# Altium PCB Hall_measurement_ver2.PcbDoc (part 2 of 2)
Units mm, origin at the board's own origin, x right, y up, seen from the top; angles counter-clockwise.
Board outline 60 x 140 mm, 4 copper layers (Top Layer, GND, Supply, Bottom Layer), stack 0.778 mm thick; 193 components, 95 nets, 656 pads, 140 vias.
Unrouted connection lines stored in the file: 276.
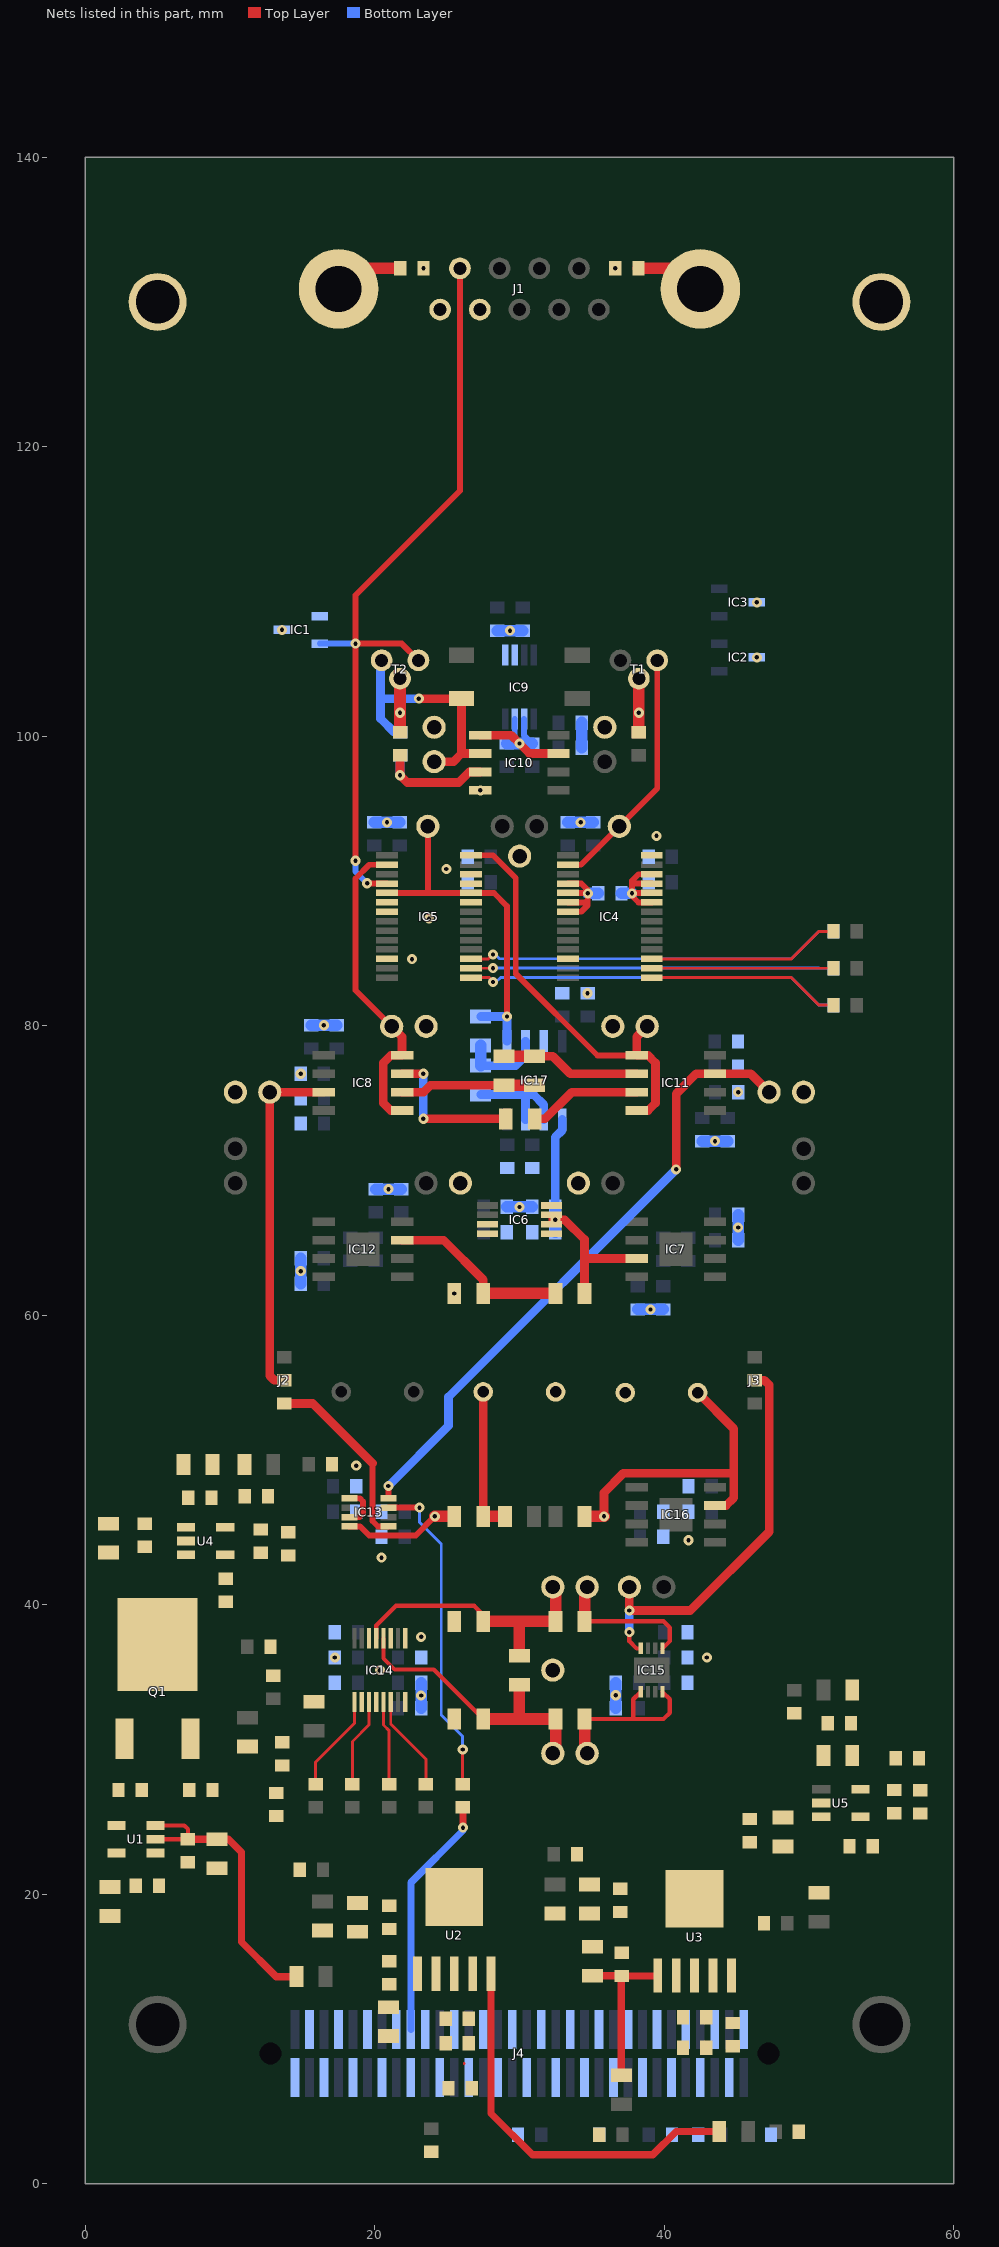
[diagram p4: the nets of this part, all layers, seen from the top]

## Via types
v1: diameter 0.7, hole 0.3, Top Layer to Bottom Layer, tented both sides, 73 vias
v2: diameter 0.7, hole 0.3, Top Layer to Bottom Layer, 67 vias

## Nets (pads, with @x,y where several pads share a name; then routed paths per layer and width w, separated by ;. In a path a pad name is that pad's centre, name@x,y a point inside that pad or via, vN(x,y) a via of type N, cw(c..) or ccw(c..) an arc to the next point about the centre after c; other vN are vias at no path point) (continued)
NetC52_1: C52.1 IC10.6 pad.@24.105,98.244 R26.2 T2.3 | length 18.6
  Top Layer w0.6: v1(23.05,102.595) R26.2@26,102.595 26,98.8 ; pad.@24.105,98.244 25.444,98.244 26,98.8 ; IC10.6@27.3,98.8 26,98.8
  Bottom Layer w0.6: T2.3@20.4,105.245 20.4,102.57 ; C52.1@21.75,100.275 21.345,100.275 20.4,101.22 20.4,102.57 ; v1(23.05,102.595) 20.425,102.595 20.4,102.57
NetC52_2: C52.2 IC10.7 R19.1 | length 8.8
  Top Layer w0.6: R19.1@21.75,98.645 v2(21.75,97.3) 22.25,96.8 25.8,96.8 26.53,97.53 IC10.7@27.3,97.53
  Bottom Layer w0.6: v2(21.75,97.3) C52.2@21.75,98.675
NetC53_1: C53.1 C54.2 IC14.4 pad.@32.305,29.734 R20.2 | length 19.8
  Top Layer w0.3: IC14.4@20.611,37.68 20.611,36.291 21.377,35.525 24.08,35.525 C53.1@27.5,32.105
  Top Layer w0.8: C53.1@27.5,32.105 30,32.105 ; C54.2@30,34.48 30,32.105 ; pad.@32.32,29.735 32.5,29.915 R20.2@32.5,32.105 30,32.105
NetC54_1: C54.1 C57.2 IC14.5 pad.@32.305,41.225 R29.2 | length 19.4
  Top Layer w0.3: IC14.5@20.111,37.68 20.111,38.566 21.475,39.93 21.525,39.93 26.87,39.93 27.5,39.3 C57.2@27.5,38.855
  Top Layer w0.8: C57.2@27.5,38.855 R29.2@32.5,38.855 32.5,41.045 pad.@32.32,41.225 ; C54.1@30,36.48 30,38.855
NetC55_2: C55.2 R21.2 R22.1 | length 10.1
  Top Layer w0.6: R21.2@27.5,46.106 C55.2@27.5,54.705
  Top Layer w0.8: R21.2@27.5,46.105 R22.1@29,46.105
NetC56_2: C56.2 IC16.3 R23.2 | length 22.3
  Top Layer w0.6: v2(35.845,46.105) 35.845,47.745 37.175,49.075 44.8,49.075 ; C56.2@42.31,54.655 44.8,52.165 44.8,49.075 ; IC16.3@43.51,46.853 44.273,46.853 44.8,47.38 44.8,49.075
  Top Layer w0.8: R23.2@34.5,46.105 v2(35.845,46.105)
NetC76_2: C76.2 C77.2 L1.2 Q1.3 U1.2 U1.3 | length 20.4
  Top Layer w0.3: U1.2@4.8,23.8 U1.2@4.85,23.8 6.3,23.8 C77.2@7.1,23.8 7.1,24.5 6.85,24.75 U1.3@4.85,24.75
  Top Layer w0.5: C77.2@7.1,23.8 C76.2@9.1,23.8 9.9,23.8 10.8,22.9 10.8,16.7 13.2,14.3 L1.2@14.6,14.3
NetC78_2: C78.2 C79.2 Q1.1 U1.5
NetC80_1: C80.1 R34.2
NetC80_2: C80.2 L2.1 Q1.2 R33.2
NetC83_2: C83.2 C84.2 L3.2 U2.1 U2.5 | length 27.3
  Top Layer w0.5: U2.5@28.04,14.504 28.04,4.86 30.9,2 39.212,2 40.812,3.6 L3.2@43.8,3.6
NetC85_1: C85.1 R36.1 R37.2 U2.4
NetC85_2: C85.2 C86.2 C87.2 L4.1 R36.2 U2.2
NetC90_2: C90.2 C91.2 L5.2 U3.1 U3.5 | length 11.5
  Top Layer w0.5: C90.2@35.05,14.375 C91.2@37.05,14.375 ; L5.2@37.041,7.49 37.041,14.366 C91.2@37.05,14.375 ; C91.2@37.091,14.334 C91.2@37.075,14.35 ; U3.1@39.56,14.39 39.52,14.35 C91.2@37.075,14.35 ; C91.2@37.05,14.375 C91.2@37.075,14.35 ; C91.2@37.05,14.375 C91.2@37.075,14.35
NetC92_1: C92.1 R38.1 R39.2 U3.4
NetC92_2: C92.2 C93.2 C94.2 L6.1 R38.2 U3.2
NetC97_2: C97.2 C98.2 L7.2 U4.2 U4.3
NetC99_2: C99.2 C100.2 C102.2 L8.1 R40.2 U4.5
NetC102_1: C102.1 R41.2
NetC104_2: C104.2 C105.2 L9.2 U5.2 U5.3
NetC106_2: C106.2 C107.2 C109.2 L10.1 R43.2 U5.5
NetC109_1: C109.1 R44.2
NetIC4_2: IC4.2 pad.@36.9,93.775 T1.1 | length 17.2
  Top Layer w0.4: IC4.2@33.35,91.12 34.245,91.12 39.52,96.395 T1.1@39.52,105.245
NetIC4_4: IC4.4 IC4.5 IC4.6 IC4.7 R4.1 | length 7.8
  Top Layer w0.4: IC4.7@33.35,87.87 34.275,87.87 34.725,88.32 34.725,88.67 ; IC4.6@33.35,88.52 34.575,88.52 34.725,88.67 ; IC4.5@33.35,89.17 34.575,89.17 v1@34.725,89.02 ; IC4.4@33.35,89.82 34.275,89.82 34.725,89.37 v1(34.725,89.145) v1@34.725,89.02 ; 34.725,88.67 v1@34.725,89.02
  Bottom Layer w0.8: v1(34.725,89.145) R4.1@35.45,89.145
NetIC4_15: IC4.15 R12.2 | length 13.3
  Top Layer w0.2: IC4.15@39.15,83.32 48.79,83.32 50.68,81.43 R12.2@51.7,81.43
NetIC4_16: IC4.16 R13.2 | length 12.6
  Top Layer w0.2: IC4.16@39.15,83.97 R13.2@51.7,83.97
NetIC4_17: IC4.17 R14.2 | length 13.3
  Top Layer w0.2: IC4.17@39.15,84.62 48.79,84.62 50.68,86.51 R14.2@51.7,86.51
NetIC4_23: IC4.23 IC4.24 IC4.25 IC4.26 R4.2 | length 7.8
  Top Layer w0.4: IC4.23@39.15,88.52 38.225,88.52 37.775,88.97 v1(37.775,89.145) v1@37.775,89.32 ; IC4.24@39.15,89.17 37.925,89.17 37.862,89.232 v1@37.775,89.32 ; IC4.25@39.15,89.82 37.925,89.82 37.775,89.67 ; IC4.26@39.15,90.47 38.225,90.47 37.775,90.02 37.775,89.67 ; v1@37.775,89.32 37.775,89.67
  Bottom Layer w0.8: R4.2@37.05,89.145 v1(37.775,89.145)
NetIC5_2: IC5.2 IC8.1 IC8.4 pad.@21.174,79.95 | length 21.9
  Top Layer w0.4: IC5.2@20.85,91.12 19.619,91.12 18.675,90.176 18.675,82.449 pad.@21.174,79.95
  Top Layer w0.6: pad.@21.174,79.95 21.89,79.234 IC8.4@21.89,77.95 21.125,77.95 20.6,77.425 20.6,74.655 21.115,74.14 IC8.1@21.89,74.14
NetIC5_15: IC5.15 R17.2 | length 26.1
  Top Layer w0.2: IC5.15@26.65,83.32 27.911,83.32 28.175,83.056 v1(28.175,83.025)
  Bottom Layer w0.2: v1(28.175,83.025) 28.39,83.025 28.685,83.32 48.79,83.32 50.68,81.43 R17.2@51.7,81.43
NetIC5_16: IC5.16 R16.2 | length 25.1
  Top Layer w0.2: IC5.16@26.65,83.97 28.175,83.97 v1(28.175,83.975)
  Bottom Layer w0.2: v1(28.175,83.975) 50.675,83.975 50.68,83.97 R16.2@51.7,83.97
NetIC5_17: IC5.17 R15.2 | length 26.1
  Top Layer w0.2: IC5.17@26.65,84.62 27.87,84.62 v1(28.175,84.925)
  Bottom Layer w0.2: v1(28.175,84.925) 28.331,84.925 28.631,84.625 48.795,84.625 50.68,86.51 R15.2@51.7,86.51
NetIC5_28: IC5.28 IC11.1 IC11.4 pad.@38.826,79.95 | length 29.1
  Top Layer w0.4: IC5.28@26.65,91.77 28.176,91.77 29.745,90.201 29.745,83.594 35.389,77.95 IC11.1@38.11,77.95
  Top Layer w0.6: IC11.4@38.11,74.14 38.885,74.14 39.4,74.655 39.4,77.43 38.88,77.95 IC11.1@38.11,77.95 38.11,79.234 pad.@38.826,79.95
NetIC8_2: IC8.2 R5.2 R6.2 | length 9.4
  Top Layer w0.6: IC8.2@21.89,75.41 23.368,75.41 23.853,75.895 R5.2@28.95,75.895
  Top Layer w0.8: R5.2@28.95,75.895 R6.2@31.05,75.895
NetIC8_3: IC8.3 R7.2 | length 10.4
  Top Layer w0.6: IC8.3@21.89,76.68 v1(23.365,76.68) ; v1(23.365,73.57) R7.2@29.05,73.57 R7.2@28.95,73.67
  Bottom Layer w0.6: v1(23.365,73.57) v1(23.365,76.68)
NetIC11_2: IC11.2 R5.1 R6.1 | length 9.7
  Top Layer w0.6: R6.1@31.05,77.895 32.305,77.895 33.52,76.68 IC11.2@38.11,76.68
  Top Layer w0.8: R5.1@28.95,77.895 R6.1@31.05,77.895
NetIC11_3: IC11.3 R7.1 | length 7.8
  Top Layer w0.6: R7.1@31.05,73.57 31.77,73.57 33.61,75.41 IC11.3@38.11,75.41
NetIC12_3: IC12.3 R9.1 R18.2 | length 12.7
  Top Layer w0.6: IC12.3@21.889,65.19 24.76,65.19 27.5,62.45 R18.2@27.5,61.505
  Top Layer w0.8: R18.2@27.5,61.505 R9.1@32.5,61.505
NetIC13_1: IC13.1 J2.3 | length 13.1
  Top Layer w0.4: 19.849,49.776 19.849,45.78 20.224,45.405 IC13.1@20.949,45.405
  Top Layer w0.6: J2.3@13.75,53.905 15.72,53.905 19.849,49.776
NetIC13_3: IC13.3 R28.2 | length 22.5
  Top Layer w0.2: R28.2@26.08,27.6 v1(26.08,30)
  Top Layer w0.4: IC13.3@20.974,46.68 IC13.3@20.949,46.705 20.951,46.707 v1(23.1,46.707)
  Bottom Layer w0.2: v1(23.1,46.707) 23.1,45.7 24.6,44.2 24.6,32.375 26.08,30.895 v1(26.08,30)
NetIC13_8: IC13.8 R21.1 | length 8.1
  Top Layer w0.4: IC13.8@18.249,45.405 18.995,45.405 19.62,44.78 22.83,44.78 v2(24.155,46.105)
  Top Layer w0.8: v2(24.155,46.105) R21.1@25.5,46.105
NetIC14_9: IC14.9 R30.1 | length 7.2
  Top Layer w0.2: R30.1@15.92,27.6 15.92,29.12 18.611,31.811 IC14.9@18.611,33.28 IC14.9@18.611,33.725
NetIC14_11: IC14.11 R27.1 | length 6.6
  Top Layer w0.2: R27.1@18.46,27.6 18.46,30.56 19.611,31.711 IC14.11@19.611,33.28 IC14.11@19.611,33.725
NetIC14_13: IC14.13 R25.1 | length 6.3
  Top Layer w0.2: IC14.13@20.611,33.725 IC14.13@20.611,33.28 20.611,31.689 21,31.3 R25.1@21,27.6
NetIC14_14: IC14.14 R24.1 | length 6.7
  Top Layer w0.2: IC14.14@21.111,33.28 21.111,31.755 23.54,29.326 R24.1@23.54,27.6
NetIC15_1: IC15.1 IC15.4 pad.@34.68,29.734 R20.1 | length 12.5
  Top Layer w0.3: R20.1@34.5,32.105 34.502,32.104 37.868,32.104 ; 38.148,32.104 37.868,32.104 ; IC15.1@38.382,33.98 37.87,33.468 37.87,33.167 37.869,33.166 37.869,32.544 37.87,32.543 37.87,32.105 ; IC15.4@39.882,33.98 40.395,33.467 40.395,32.544 39.956,32.105 37.87,32.105 ; 37.868,32.104 37.87,32.105
  Top Layer w0.8: R20.1@34.5,32.105 34.5,29.915 pad.@34.68,29.734
NetIC15_5: IC15.5 pad.@34.68,41.225 R29.1 | length 10.2
  Top Layer w0.3: R29.1@34.5,38.855 39.956,38.855 40.395,38.416 40.395,37.493 IC15.5@39.882,36.98
  Top Layer w0.8: R29.1@34.5,38.855 34.5,41.045 pad.@34.68,41.225
NetIC15_8: IC15.8 J3.2 pad.@37.597,41.225 | length 27.9
  Top Layer w0.3: v1(37.594,38.105) 37.594,37.481 38.095,36.98 IC15.8@38.382,36.98
  Top Layer w0.6: pad.@37.597,41.225 v1(37.597,39.607) 41.807,39.607 47.25,45.05 47.25,55.175 46.92,55.505 J3.2@46.3,55.505
  Bottom Layer w0.3: v1(37.594,38.105) v1@37.597,38.108
  Bottom Layer w0.6: v1@37.597,38.108 v1(37.597,39.607)
NetIC17_2: IC17.2 R31.2 R32.1 | length 5.8
  Bottom Layer w0.6: R31.2@27.325,77.245 29.75,77.245 30.415,77.91 IC17.2@30.415,78.92
  Bottom Layer w0.8: R31.2@27.325,77.245 R32.1@27.325,78.64
NetIC17_6: IC17.6 IC17.7 R31.1 | length 7.4
  Bottom Layer w0.6: R31.1@27.325,75.245 30.415,75.245 ; IC17.7@30.415,73.52 30.415,75.245 ; IC17.6@31.685,73.52 31.685,74.535 30.975,75.245 30.415,75.245
NetJ1_10: J1.10 R1.2 | length 4.9
  Top Layer w0.8: R1.2@38.225,132.322 41.073,132.322 J1.10@42.495,130.9
NetJ1_11: J1.11 R2.2 | length 4.9
  Top Layer w0.8: J1.11@17.505,130.9 18.927,132.322 R2.2@21.775,132.322
NetR8_2: R8.2 T1.2 | length 3.5
  Top Layer w0.8: R8.2@38.25,100.275 T1.2@38.25,103.775
  other v2: 38.25,101.62
NetR19_2: R19.2 T2.2 | length 3.7
  Top Layer w0.8: R19.2@21.75,100.275 21.75,101.42 T2.2@21.75,103.975
  other v2: 21.75,101.62
NetR33_1: R33.1 R34.1 R35.2 U1.4
NetR40_1: R40.1 R41.1 R42.2 U4.4
NetR43_1: R43.1 R44.1 R45.2 U5.4
OUT+: IC8.7 J2.2 pad.@12.75,75.41 | length 24.5
  Top Layer w0.6: J2.2@13.75,55.505 13.07,55.505 12.75,55.825 pad.@12.75,75.41 IC8.7@16.491,75.41
OUT-: IC11.7 IC13.4 pad.@47.25,75.41 | length 43.7
  Top Layer w0.4: IC13.4@20.949,47.355 v1(20.949,48.205)
  Top Layer w0.6: v1(40.825,70.075) 40.825,75.3 42.205,76.68 IC11.7@43.51,76.68 45.98,76.68 pad.@47.25,75.41
  Bottom Layer w0.6: v1(20.949,48.205) 25.1,52.356 25.1,54.35 v1(40.825,70.075)
REF5_1: C32.2 C33.2 IC9.6 IC9.7 IC10.3 IC10.5 | length 11.5
  Top Layer w0.6: IC10.5@27.3,100.07 29.425,100.07 v1(30,99.495) 30.695,98.8 IC10.3@32.7,98.8
  Bottom Layer w0.4: C33.2@29.125,99.495 29.675,100.045 IC9.7@29.675,101.195 ; IC9.6@30.325,101.195 30.325,100.045 C32.2@30.875,99.495
  Bottom Layer w0.8: C33.2@29.125,99.495 v1(30,99.495) C32.2@30.875,99.495
REF5_2: C22.2 C23.2 IC6.6 IC6.7 IC7.3 IC17.5 R9.2 | length 18.6
  Top Layer w0.4: IC6.6@32.2,66.28 IC6.7@32.2,66.93
  Top Layer w0.6: v2(32.48,66.605) 33.12,66.605 34.5,65.225 34.5,63.92 ; R9.2@34.5,61.505 34.5,63.92 ; IC7.3@38.11,63.92 34.5,63.92
  Bottom Layer w0.6: C22.2@32.48,67.48 32.48,72.305 32.955,72.78 IC17.5@32.955,73.52
  Bottom Layer w0.8: C23.2@32.48,65.73 v2(32.48,66.605) C22.2@32.48,67.48
SWITCH_IN: J4.18 R28.1 | length 16.8
  Top Layer w0.5: R28.1@26.08,26 26.1,25.98 v2(26.1,24.6)
  Bottom Layer w0.5: J4.18@22.5,10.65 22.5,20.8 26.1,24.4 v2(26.1,24.6)
THERMO_A: C1.2 C2.2 C3.2 C4.1 C5.1 C6.1 C7.2 C8.1 C9.1 C10.1 C11.1 C12.1 C13.1 C14.1 C15.1 C16.2 C17.1 C18.2 C19.1 C20.2 C22.1 C23.1 C24.1 C25.1 C26.1 C27.1 C30.2 C31.2 C34.1 C35.2 C36.1 C37.1 C38.2 C39.2 C40.1 C41.2 C42.1 C43.2 C44.1 C45.2 C46.1 C47.1 C48.1 C49.1 C50.2 C53.2 C55.1 C56.1 C57.1 C58.1 C59.1 C60.1 C61.1 C62.1 C63.2 C64.1 C65.2 C66.1 C67.2 C68.1 C69.2 C70.1 C71.1 C72.1 C73.1 C74.1 C75.1 C76.1 C77.1 C78.1 C79.1 C81.1 C82.1 C83.1 C84.1 C86.1 C87.1 C88.1 C89.1 C90.1 C91.1 C93.1 C94.1 C95.1 C96.1 C97.1 C98.1 C99.1 C100.1 C101.1 C103.1 C104.1 C105.1 C106.1 C107.1 C108.1 IC1.1 IC1.3 IC2.3 IC3.3 IC4.12 IC4.28 IC5.6 IC5.7 IC5.12 IC5.23 IC5.25 IC5.26 IC6.3 IC6.4 IC6.5 IC6.8 IC9.1 IC9.2 IC10.8 IC13.5 IC13.7 IC14.1 IC14.3 IC14.6 IC14.10 IC14.12 IC14.16 IC17.3 J1.4 J1.5 J4.1 J4.4 J4.5 J4.8 J4.9 J4.12 J4.13 J4.16 J4.17 J4.20 J4.21 J4.24 J4.25 J4.28 J4.29 J4.32 J4.33 J4.36 J4.37 J4.40 J4.41 J4.44 J4.45 J4.48 J4.49 J4.52 J4.53 J4.56 J4.57 J4.60 J4.61 J4.64 pad.0@5,130 pad.0@55,130 pad.@10.375,75.41 pad.@23.549,79.95 pad.@24.105,100.619 pad.@25.924,69.125 pad.@30.009,91.714 pad.@32.305,35.48 pad.@34.076,69.125 pad.@35.895,100.619 pad.@36.451,79.95 pad.@49.625,75.41 R1.1 R2.1 R18.1 R35.1 R37.1 R39.1 R42.1 R45.1 U1.1 U2.3 U2.6 U3.3 U3.6 U4.1 | length 25.7
  Top Layer w0.4: IC13.7@18.249,46.055 18.955,46.055 19.2,46.3 19.2,47.124 18.969,47.355 IC13.5@18.249,47.355
  Bottom Layer w0.8: C36.1@14.889,62.17 C35.2@14.889,63.92 ; C5.1@15.615,80.03 C4.1@17.365,80.03 ; C15.1@19.975,94.05 C14.1@21.725,94.05 ; C27.1@20.075,68.71 C26.1@21.824,68.71 ; C50.2@23.211,32.855 C45.2@23.211,34.605 ; C31.2@28.475,107.295 C30.2@30.225,107.295 ; C7.2@29.13,67.48 C22.1@30.88,67.48 ; C9.1@33.35,94.05 C8.1@35.1,94.05 ; C39.2@34.3,99.195 C34.1@34.3,100.945 ; C58.1@36.657,32.855 C41.2@36.658,34.605 ; C25.1@38.175,60.4 C24.1@39.925,60.4 ; C2.2@42.636,72.028 C1.2@44.386,72.028 ; C18.2@45.11,65.19 C17.1@45.11,66.94
  other v1: 23.211,33.73 36.657,33.75 20.361,35.48 42.946,36.355 23.211,37.78 20.475,43.25 41.685,44.45 18.723,49.61 39.05,60.4 14.889,63.045 45.11,66.065 30.005,67.48 20.949,68.71 43.51,72.028 16.49,80.03 22.575,84.6 23.75,87.4 24.95,90.825 39.468,93.115 20.85,94.05 34.225,94.05 29.35,107.295
  other v2: 17.248,36.355 25.5,61.505 45.11,75.41 14.89,76.68 34.705,82.24 27.3,96.26 46.4,105.445 13.6,107.345 46.4,109.245 23.375,132.322 36.625,132.322
THERMO_B: IC1.2 IC5.4 J1.9 T2.1 | length 54.5
  Top Layer w0.4: v1(18.675,91.395) v1(18.675,106.395) ; v1@19.5,89.82 IC5.4@20.85,89.82 ; T2.1@23.02,105.245 21.87,106.395 v1(18.675,106.395) ; J1.9@25.89,132.322 25.89,116.96 18.675,109.745 v1(18.675,106.395)
  Bottom Layer w0.4: IC1.2@16.2,106.395 v1(18.675,106.395) v1@18.713,106.395 ; v1(18.675,91.395) 18.675,90.645 v1(19.475,89.845)
V_CALIB: IC5.5 IC5.24 IC17.1 pad.@23.675,93.775 R32.2 | length 24.4
  Top Layer w0.2: 23.65,89.17 23.675,89.195
  Top Layer w0.4: IC5.5@20.85,89.17 23.65,89.17 IC5.24@26.65,89.17 28.236,89.17 29.145,88.261 v1(29.145,80.64) ; 23.675,89.195 pad.@23.675,93.775
  Bottom Layer w0.6: R32.2@27.325,80.64 v1(29.145,80.64) IC17.1@29.145,78.92
pads on no net: IC4.3 IC4.13 IC4.14 IC5.3 IC5.13 IC5.14 IC7.1 IC7.5 IC7.8 IC12.1 IC12.5 IC12.8 IC16.1 IC16.5 IC16.8 J1.3 J1.8 J4.3 J4.7 J4.11 J4.15 J4.19 J4.23 J4.27 J4.31 J4.34 J4.38 J4.42 J4.43 J4.46 J4.50 J4.54 J4.55 J4.58 J4.62 J4.65 J4.66 U5.1

## Polygon pours and split planes (outlines as drawn)
THERMO_A on Bottom Layer "Bottom Layer-THERMO_A" (solid, pour order 2): 0.5,0.5 59.5,0.5 59.5,139.5 0.5,139.5
-V_AD8676 on Bottom Layer "Bottom Layer--12" (solid, pour order 0): 28.925,100.47 28.925,106.32 31.075,106.32 31.075,100.47
THERMO_A on Top Layer "Top Layer-THERMO_A" (solid, pour order 4): 0.5,139.5 59.5,139.5 59.5,0.5 0.5,0.5
THERMO_A on GND (split plane): 59.49,0.51 0.51,0.51 0.51,139.49 59.49,139.49
THERMO_A on Supply (split plane): 17.809,35.375 17.816,35.323 17.836,35.274 17.868,35.232 17.91,35.2 17.958,35.18 18.011,35.173 19.648,35.173 19.648,0.51 0.51,0.51 0.51,44.396 17.809,44.396
+6 on Supply (split plane): 22.398,46.627 22.398,44.8 18.027,44.8 18.011,44.802 16.425,44.802 16.408,44.8 0.51,44.8 0.51,46.923 16.123,46.923 16.123,46.275 16.13,46.223 16.15,46.174 16.182,46.132 16.224,46.1 16.273,46.08 16.325,46.073 17.825,46.073 17.877,46.08 17.926,46.1 17.968,46.132 18,46.174 18.02,46.223 18.027,46.275 18.027,46.923 22.398,46.923
-6 on Supply (split plane): 22.398,47.327 17.825,47.327 17.773,47.32 17.724,47.3 17.682,47.268 17.65,47.226 17.63,47.177 17.623,47.125 17.623,46.477 16.527,46.477 16.527,47.125 16.52,47.177 16.5,47.226 16.468,47.268 16.426,47.3 16.377,47.32 16.325,47.327 0.51,47.327 0.51,49.473 22.398,49.473
-V_AD8676 on Supply (split plane): 11.198,64.925 11.205,64.873 11.225,64.824 11.257,64.782 11.299,64.75 11.348,64.73 11.4,64.723 15.598,64.723 15.598,63.2 15.605,63.148 15.625,63.099 15.657,63.057 15.699,63.025 15.748,63.005 15.8,62.998 17.175,62.998 17.227,63.005 17.276,63.025 17.318,63.057 17.35,63.099 17.37,63.148 17.377,63.2 17.377,66.948 22.398,66.948 22.398,64.827 21.275,64.827 21.223,64.82 21.174,64.8 21.132,64.768 21.1,64.726 21.08,64.677 21.073,64.625 21.073,63.225 21.08,63.173 21.1,63.124 21.132,63.082 21.174,63.05 21.223,63.03 21.275,63.023 22.398,63.023 22.398,60.052 0.51,60.052 0.51,64.723 9.35,64.723 9.402,64.73 9.451,64.75 9.493,64.782 9.525,64.824 9.545,64.873 9.552,64.925 9.552,69.948 11.198,69.948
THERMO_A on Supply (split plane): 22.398,49.877 0.51,49.877 0.51,59.648 22.398,59.648
+12 on Supply (split plane): 15.498,75.85 15.505,75.798 15.525,75.749 15.557,75.707 15.599,75.675 15.648,75.655 15.7,75.648 29.623,75.648 29.623,66.852 24.827,66.852 24.827,70.2 24.82,70.252 24.8,70.301 24.768,70.343 24.726,70.375 24.677,70.395 24.625,70.402 22.6,70.402 22.548,70.395 22.499,70.375 22.457,70.343 22.425,70.301 22.405,70.252 22.398,70.2 22.398,67.352 17.175,67.352 17.123,67.345 17.074,67.325 17.032,67.293 17,67.251 16.98,67.202 16.973,67.15 16.973,63.402 16.002,63.402 16.002,64.925 15.995,64.977 15.975,65.026 15.943,65.068 15.901,65.1 15.852,65.12 15.8,65.127 11.602,65.127 11.602,70.15 11.595,70.202 11.575,70.251 11.543,70.293 11.501,70.325 11.452,70.345 11.4,70.352 9.35,70.352 9.298,70.345 9.249,70.325 9.207,70.293 9.175,70.251 9.155,70.202 9.148,70.15 9.148,65.127 0.51,65.127 0.51,77.423 15.498,77.423
-V_AD8676 on Supply (split plane): 59.49,77.827 44.402,77.827 44.402,78.675 44.395,78.727 44.375,78.776 44.343,78.818 44.301,78.85 44.252,78.87 44.2,78.877 42.825,78.877 42.773,78.87 42.724,78.85 42.682,78.818 42.65,78.776 42.63,78.727 42.623,78.675 42.623,74.8 42.63,74.748 42.65,74.699 42.682,74.657 42.724,74.625 42.773,74.605 42.825,74.598 43.873,74.598 43.873,73.702 37.327,73.702 37.327,77.625 37.32,77.677 37.3,77.726 37.268,77.768 37.226,77.8 37.177,77.82 37.125,77.827 0.51,77.827 0.51,82.498 59.49,82.498
+12 on Supply (split plane): 33.748,87.8 33.755,87.748 33.775,87.699 33.807,87.657 33.849,87.625 33.898,87.605 33.95,87.598 59.49,87.598 59.49,82.902 0.51,82.902 0.51,87.573 20.275,87.573 20.327,87.58 20.376,87.6 20.418,87.632 20.45,87.674 20.47,87.723 20.477,87.775 20.477,92.848 27.398,92.848 27.398,90.25 27.405,90.198 27.425,90.149 27.457,90.107 27.499,90.075 27.548,90.055 27.6,90.048 30,90.048 30.052,90.055 30.101,90.075 30.143,90.107 30.175,90.149 30.195,90.198 30.202,90.25 30.202,94.673 33.748,94.673
THERMO_A on Supply (split plane): 59.49,109.802 0.51,109.802 0.51,139.49 59.49,139.49
-V_AD8676 on Supply (split plane): 59.49,88.002 34.152,88.002 34.152,94.875 34.145,94.927 34.125,94.976 34.093,95.018 34.051,95.05 34.002,95.07 33.95,95.077 30,95.077 29.948,95.07 29.899,95.05 29.857,95.018 29.825,94.976 29.805,94.927 29.798,94.875 29.798,90.452 27.802,90.452 27.802,93.05 27.795,93.102 27.775,93.151 27.743,93.193 27.701,93.225 27.652,93.245 27.6,93.252 20.275,93.252 20.223,93.245 20.174,93.225 20.132,93.193 20.1,93.151 20.08,93.102 20.073,93.05 20.073,87.977 0.51,87.977 0.51,109.398 59.49,109.398
THERMO_A on Supply (split plane): 34.863,0.51 25.152,0.51 25.152,30.598 34.863,30.598
+3.3 on Supply (split plane): 24.748,0.51 20.052,0.51 20.052,35.173 24.748,35.173
THERMO_A on Supply (split plane): 59.49,0.51 40.352,0.51 40.352,32.098 59.49,32.098
+2.5 on Supply (split plane): 36.923,73.5 36.93,73.448 36.95,73.399 36.982,73.357 37.024,73.325 37.073,73.305 37.125,73.298 44.075,73.298 44.127,73.305 44.176,73.325 44.218,73.357 44.25,73.399 44.27,73.448 44.277,73.5 44.277,74.8 44.27,74.852 44.25,74.901 44.218,74.943 44.176,74.975 44.127,74.995 44.075,75.002 43.027,75.002 43.027,76.023 45.573,76.023 45.573,70.352 42.825,70.352 42.773,70.345 42.724,70.325 42.682,70.293 42.65,70.251 42.63,70.202 42.623,70.15 42.623,64.802 37.475,64.802 37.423,64.795 37.374,64.775 37.332,64.743 37.3,64.701 37.28,64.652 37.273,64.6 37.273,60.077 30.625,60.077 30.573,60.07 30.524,60.05 30.482,60.018 30.45,59.976 30.43,59.927 30.423,59.875 30.423,49.675 30.43,49.623 30.45,49.574 30.482,49.532 30.524,49.5 30.573,49.48 30.625,49.473 35.065,49.473 37.548,49.473 37.548,44.425 37.555,44.373 37.575,44.324 37.607,44.282 37.649,44.25 37.698,44.23 37.75,44.223 40.823,44.223 40.823,43.2 40.823,40.377 37.75,40.377 37.698,40.37 37.649,40.35 37.607,40.318 37.575,40.276 37.555,40.227 37.548,40.175 37.548,37.601 37.5,31.002 25.152,31.002 25.152,35.375 25.145,35.427 25.125,35.476 25.093,35.518 25.051,35.55 25.002,35.57 24.95,35.577 20.052,35.577 20.052,41.473 26.375,41.473 26.427,41.48 26.476,41.5 26.518,41.532 26.55,41.574 26.57,41.623 26.577,41.675 26.577,44.598 26.57,44.65 26.55,44.699 26.518,44.74 26.476,44.772 26.427,44.793 26.375,44.8 22.802,44.8 22.802,46.627 22.802,49.675 22.802,63.225 22.795,63.277 22.775,63.326 22.743,63.368 22.701,63.4 22.652,63.42 22.6,63.427 21.477,63.427 21.477,64.423 22.6,64.423 22.652,64.43 22.701,64.45 22.743,64.482 22.775,64.524 22.795,64.573 22.802,64.625 22.802,69.998 24.423,69.998 24.423,66.65 24.43,66.598 24.45,66.549 24.482,66.507 24.524,66.475 24.573,66.455 24.625,66.448 29.825,66.448 29.877,66.455 29.926,66.475 29.968,66.507 30,66.549 30.02,66.598 30.027,66.65 30.027,75.85 30.02,75.902 30,75.951 29.968,75.993 29.926,76.025 29.877,76.045 29.825,76.052 15.902,76.052 15.902,77.423 36.923,77.423
-2 on Supply (split plane): 39.998,33.602 39.125,33.602 39.073,33.595 39.024,33.575 38.982,33.543 38.95,33.501 38.93,33.452 38.923,33.4 38.923,32.3 38.93,32.248 38.95,32.199 38.982,32.157 39.024,32.125 39.073,32.105 39.125,32.098 39.948,32.098 39.948,0.51 35.267,0.51 35.267,30.598 37.7,30.598 37.725,30.602 37.751,30.605 37.752,30.605 37.776,30.615 37.8,30.625 37.801,30.625 37.821,30.641 37.842,30.656 37.842,30.657 37.843,30.657 37.858,30.678 37.874,30.698 37.874,30.699 37.875,30.699 37.884,30.723 37.894,30.746 37.895,30.747 37.895,30.748 37.898,30.773 37.902,30.799 37.95,37.395 39.121,37.373 39.123,37.374 39.125,37.373 39.149,37.376 39.174,37.379 39.175,37.38 39.177,37.38 39.2,37.39 39.223,37.398 39.224,37.4 39.226,37.4 39.245,37.415 39.265,37.43 39.266,37.431 39.268,37.432 39.283,37.452 39.298,37.471 39.299,37.473 39.3,37.474 39.309,37.497 39.319,37.519 39.319,37.521 39.32,37.523 39.323,37.547 39.327,37.571 39.326,37.573 39.327,37.575 39.327,38.398 39.998,38.398
+5 on Supply (split plane): 26.173,41.877 19.85,41.877 19.798,41.87 19.749,41.85 19.707,41.818 19.675,41.776 19.655,41.727 19.648,41.675 19.648,35.577 18.212,35.577 18.212,44.396 22.6,44.396 26.173,44.396
+12 on Supply (split plane): 59.49,47.302 41.025,47.302 40.973,47.295 40.924,47.275 40.882,47.243 40.85,47.201 40.83,47.152 40.823,47.1 40.823,44.627 37.952,44.627 37.952,49.473 59.49,49.473
+6 on Supply (split plane): 59.49,32.502 39.327,32.502 39.327,33.198 40.2,33.198 40.252,33.205 40.301,33.225 40.343,33.257 40.375,33.299 40.395,33.348 40.402,33.4 40.402,38.6 40.395,38.652 40.375,38.701 40.343,38.743 40.301,38.775 40.252,38.795 40.2,38.802 39.125,38.802 39.073,38.795 39.024,38.775 38.982,38.743 38.95,38.701 38.93,38.652 38.923,38.6 38.923,37.78 37.952,37.798 37.952,39.973 41.025,39.973 41.077,39.98 41.126,40 41.168,40.032 41.2,40.074 41.22,40.123 41.227,40.175 41.227,43.2 41.227,46.898 59.49,46.898
THERMO_A on Supply (split plane): 47.998,53.15 48.005,53.098 48.025,53.049 48.057,53.007 48.099,52.975 48.148,52.955 48.2,52.948 49.825,52.948 49.877,52.955 49.926,52.975 49.968,53.007 50,53.049 50.02,53.098 50.027,53.15 50.027,59.648 59.49,59.648 59.49,49.877 35.065,49.877 30.827,49.877 30.827,59.673 47.998,59.673
-V_AD8676 on Supply (split plane): 50.448,64.925 50.455,64.873 50.475,64.824 50.507,64.782 50.549,64.75 50.598,64.73 50.65,64.723 59.49,64.723 59.49,60.052 49.825,60.052 49.773,60.045 49.724,60.025 49.682,59.993 49.65,59.951 49.63,59.902 49.623,59.85 49.623,53.352 48.402,53.352 48.402,59.875 48.395,59.927 48.375,59.976 48.343,60.018 48.301,60.05 48.252,60.07 48.2,60.077 37.677,60.077 37.677,64.398 48.6,64.398 48.652,64.405 48.701,64.425 48.743,64.457 48.775,64.499 48.795,64.548 48.802,64.6 48.802,69.948 50.448,69.948
+12 on Supply (split plane): 43.998,77.625 44.005,77.573 44.025,77.524 44.057,77.482 44.099,77.45 44.148,77.43 44.2,77.423 59.49,77.423 59.49,65.127 50.852,65.127 50.852,70.15 50.845,70.202 50.825,70.251 50.793,70.293 50.751,70.325 50.702,70.345 50.65,70.352 48.6,70.352 48.548,70.345 48.499,70.325 48.457,70.293 48.425,70.251 48.405,70.202 48.398,70.15 48.398,64.802 43.027,64.802 43.027,69.948 45.775,69.948 45.827,69.955 45.876,69.975 45.918,70.007 45.95,70.049 45.97,70.098 45.977,70.15 45.977,76.225 45.97,76.277 45.95,76.326 45.918,76.368 45.876,76.4 45.827,76.42 45.775,76.427 43.027,76.427 43.027,78.473 43.998,78.473

## Other copper
GND (plane layer: these items are gaps in the copper):
  region: 26.31,98.025 26.31,97.025 28.285,97.025 28.285,98.025
  region: 26.31,99.295 26.31,98.295 28.285,98.295 28.285,99.295
  region: 26.31,100.565 26.31,99.565 28.285,99.565 28.285,100.565
  region: 31.71,99.295 31.71,98.295 33.685,98.295 33.685,99.295
  region: 31.71,98.025 31.71,97.025 33.685,97.025 33.685,98.025
  region: 31.71,96.755 31.71,95.755 33.685,95.755 33.685,96.755
  region: 30.91,74.51 29.91,74.51 29.91,72.535 30.91,72.535
  region: 32.18,74.51 31.18,74.51 31.18,72.535 32.18,72.535
  region: 33.45,74.51 32.45,74.51 32.45,72.535 33.45,72.535
  region: 29.64,79.91 28.64,79.91 28.64,77.935 29.64,77.935
  region: 32.18,79.91 31.18,79.91 31.18,77.935 32.18,77.935
  region: 30.91,79.91 29.91,79.91 29.91,77.935 30.91,77.935
  region: 44.5,45.088 44.5,46.088 42.525,46.088 42.525,45.088
  region: 44.5,46.358 44.5,47.358 42.525,47.358 42.525,46.358
  region: 39.1,46.358 39.1,47.358 37.125,47.358 37.125,46.358
  region: 44.5,63.425 44.5,64.425 42.525,64.425 42.525,63.425
  region: 39.1,64.695 39.1,65.695 37.125,65.695 37.125,64.695
  region: 39.1,63.425 39.1,64.425 37.125,64.425 37.125,63.425
  region: 17.48,64.695 17.48,65.695 15.505,65.695 15.505,64.695
  region: 22.88,64.695 22.88,65.695 20.905,65.695 20.905,64.695
  region: 22.88,63.425 22.88,64.425 20.905,64.425 20.905,63.425
  region: 44.5,76.185 44.5,77.185 42.525,77.185 42.525,76.185
  region: 39.1,73.645 39.1,74.645 37.125,74.645 37.125,73.645
  region: 39.1,77.455 39.1,78.455 37.125,78.455 37.125,77.455
  region: 17.481,74.915 17.481,75.915 15.506,75.915 15.506,74.915
  region: 22.881,73.645 22.881,74.645 20.906,74.645 20.906,73.645
  region: 22.881,77.455 22.881,78.455 20.906,78.455 20.906,77.455
Supply (plane layer: these items are gaps in the copper):
  lines w0.254: 22.6,59.875 22.6,63.225
  lines w0.4: 0,44.598 22.6,44.598 ; 0,47.125 16.325,47.125 16.325,46.275 16.575,46.275 17.6,46.275 17.825,46.275 17.825,47.125 22.6,47.125 ; 0,49.675 22.6,49.675 ; 0,59.85 19.85,59.85 22.575,59.85 ; 0,77.625 8.65,77.625 19.6,77.625 37.125,77.625 37.125,73.5 44.075,73.5 44.075,74.8 42.825,74.8 42.825,78.675 44.2,78.675 44.2,77.625 60,77.625 ; 0,82.7 60,82.7 ; 0,87.775 20.275,87.775 20.275,93.05 27.6,93.05 27.6,90.25 30,90.25 30,94.875 33.95,94.875 33.95,87.8 60,87.8 ; 0,109.6 60,109.6 ; 0.05,64.925 9.35,64.925 9.35,70.15 11.4,70.15 11.4,64.925 15.8,64.925 15.8,63.2 17.175,63.2 17.175,67.15 22.575,67.15 ; 15.125,77.625 15.7,77.625 15.7,75.85 17.5,75.85 29.825,75.85 29.825,66.65 24.625,66.65 24.625,70.2 22.6,70.2 22.6,64.625 21.275,64.625 21.275,63.225 22.6,63.225 22.6,49.675 ; 16.425,44.6 18.011,44.6 18.011,35.375 19.85,35.375 ; 19.85,0 19.85,35.375 ; 24.95,0 24.95,35.375 19.85,35.375 ; 24.95,30.8 35.065,30.8 ; 35.065,0 35.065,30.8 ; 37.075,59.875 48.2,59.875 48.2,53.15 49.825,53.15 49.825,59.85 60,59.85 ; 37.75,49.675 37.75,44.425 41.025,44.425 ; 40.15,-0.075 40.15,32.225 ; 42.825,76.225 45.775,76.225 45.775,70.15 42.825,70.15 42.825,64.6 ; 59.95,64.925 50.65,64.925 50.65,70.15 48.6,70.15 48.6,64.6 42.825,64.6 ; 60,32.3 39.125,32.3 39.125,33.4 40.2,33.4 40.2,38.6 39.125,38.6 39.125,37.575 37.75,37.6 ; 60,47.1 41.025,47.1 41.025,43.2 41.025,40.175 37.75,40.175 37.75,37.6 ; 60,49.675 35.065,49.675 30.625,49.675 30.625,59.875 37.475,59.875 37.475,64.6 42.825,64.6 ; 19.85,35.375 19.85,41.675 26.375,41.675 26.375,44.598 22.6,44.598 ; 22.6,44.598 22.6,46.627 22.6,49.675 ; 35.065,30.8 37.7,30.8 37.75,37.6

## Silkscreen, mask and mechanical layers (free items; w line width, h text height)
Top Overlay:
  text "V_CALIB" at 15.8,93.35 h1
  text "-12" at 24.925,93.267 h1
  text "+12" at 32.575,93.267 h1
  text "GND" at 30.485,87.663 h1 r90
  text "GND" at 24.925,79.474 h1
  text "GND" at 32.4,79.474 h1
  text "GND" at 6.324,74.934 h1
  text "GND" at 51,74.911 h1
  text "+12" at 11.758,71 h1
  text "+12" at 45.759,71 h1
  text "+2.5" at 24.05,70.5 h1 r90
  text "GND" at 26.4,70.5 h1 r90
  text "GND" at 34.575,70.5 h1 r90
  text "+5" at 36.951,70.5 h1 r90
  text "-12" at 11.758,68.625 h1
  text "-12" at 45.759,68.625 h1
  text "+2.5" at 41.35,40.725 h1
  text "GND" at 33.675,34.975 h1
Mechanical 2:
  the board outline again, w0.4
Mechanical 12:
  the board outline again, w0.4

## Dimensions
0,140 to 0,0 on Mechanical 12
0,140 to 60,140 on Mechanical 12

## Text inside footprints (layer, text, board x,y; h text height)
J1: Mechanical 14 "9" at 24.25,131.825 h1.2; Mechanical 14 "1" at 37.35,129.325 h1.2; Mechanical 14 "5" at 23.15,129.325 h1.2; Mechanical 14 "6" at 36.375,131.825 h1.2; Bottom Overlay "6" at 36.375,131.825 h1.2; Bottom Overlay "5" at 23.15,129.325 h1.2; Bottom Overlay "1" at 37.35,129.325 h1.2; Bottom Overlay "9" at 24.25,131.825 h1.2